# Allegro board hfplink.brd
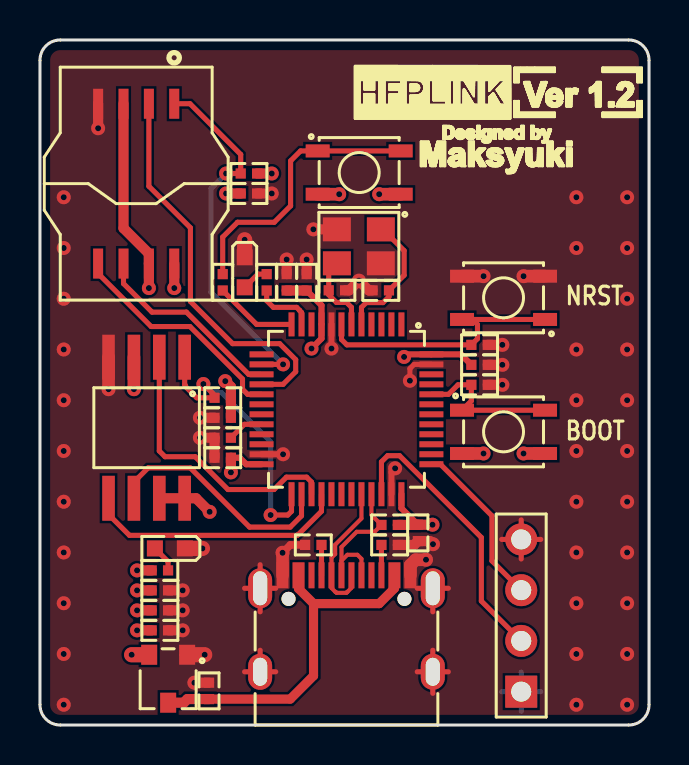
[diagram p0: board, top side]
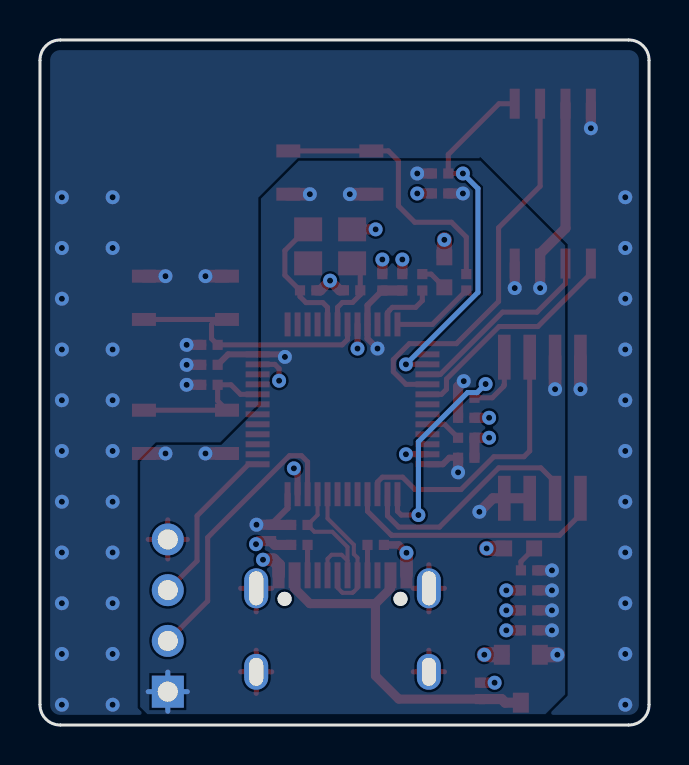
[diagram p1: board, bottom side, seen from below]

Outline 30.48 x 34.29 mm; copper layers: TOP, BOTTOM. Coordinates in mm from the lower left corner of the outline.
Outline path: 0,33.27 0,1.02 arc(0.3,0.3) 1.02,0 29.46,0 arc(30.18,0.3) 30.48,1.02 30.48,33.27 arc(30.18,33.99) 29.46,34.29 1.02,34.29 arc(0.3,33.99) 0,33.27

## Design rules (mm)
net group USB_DP: nets DN DP

## Placement (name value [footprint] x y rotation side)
C1  100nF  [C0402]  22 18.03 180 top
C2  10pF  [C0402]  17.06 21.76 180 top
C3  100nF  [C0402]  18.91 9.62 90 top
C4  10pF  [C0402]  14.86 21.76 0 top
C5  100nF  [C0402]  13.35 22.16 270 top
C6  10uF  [C0402]  8.46 1.71 90 top
C7  10uF  [C0402]  6 5.74 0 top
C8  10uF  [C0402]  6 4.74 0 top
C9  100nF  [C0402]  6 6.74 0 top
C10  100nF  [C0402]  12.35 22.16 90 top
C11  100nF  [C0402]  9.15 13.38 0 top
C12  100nF  [C0402]  22 19.03 0 top
C13  100nF  [C0402]  10.46 26.61 0 top
C14  100nF  [C0402]  9.15 15.38 180 top
J1  USB_TYPEC  [USB-TYPEC-12-SM]  15.34 5.08 0 top
J2  HEADER-4X1  [HDR4X1-2R54-TM-VM]  24.08 1.67 90 top
J3  ACA-SPI-004-K02  [ACA-SPI-004-K02-SM]  4.82 27.1 0 top
LED1  RED  [LED0603]  6.5 8.84 180 top
LED2  BLUE  [LED0603]  10.25 22.66 270 top
R1  5.1K  [R0402]  13.68 9.02 0 top
R2  5.1K  [R0402]  17.5 9.02 0 top
R3  1.5K  [R0402]  17.5 10.02 0 top
R4  2K  [R0402]  6 7.74 0 top
R5  2K  [R0402]  11.35 22.16 270 top
R6  10K  [R0402]  9.15 14.38 180 top
R7  10K  [R0402]  22 17.03 0 top
R8  330R  [R0402]  9.15 22.16 90 top
R9  10K  [R0402]  10.46 27.61 180 top
R10  10K  [R0402]  9.15 16.38 180 top
SW1  RESET  [SW-4-1R20X0R65-SM]  23.2 21.38 180 top
SW2  BOOT  [SW-4-1R20X0R65-SM]  23.2 14.68 0 top
SW3  USER  [SW-4-1R20X0R65-SM]  15.97 27.65 0 top
U1  STM/CH32V103C8T6  [LQFP-48-1R20X0R30]  15.34 15.8 180 top
U2  XC6206P332MR  [SOT-23-3-1R00X0R80]  6.42 2.32 270 top
U3  W25Q128JVSIQ  [SOIC-8-2R25X0R63]  5.34 14.88 180 top
X1  8MHz 10pF 10ppm  [XTAL-4-3R20X2R50-SM]  15.96 23.96 180 top

## Library data of the parts
C1-C14 = CAPACITOR-NON-POL
J1 = USB_TYPEC
J2 = HEADER-4X1
J3 = ACA-SPI-004-K02
LED1 LED2 = LED
R1-R10 = RESISTOR
SW1-SW3 = SW-KEY-4
U1 = STM/CH32F103C8T6
U2 = XC6206P332MR
U3 = W25Q128JVSIQ
X1 = XTAL-CRY-4

## Footprints (pads in the part's own frame, mm; a bottom-side part is the same pattern mirrored in y, then rotated)
ACA-SPI-004-K02-SM
  rect 0.5x1.5 smd: 1(1.905,4) 2(0.635,4) 3(-0.635,4) 4(-1.905,4) 5(-1.905,-4) 6(-0.635,-4) 7(0.635,-4) 8(1.905,-4)
C0402
  rect 0.51x0.51 smd: 1(-0.41,0) 2(0.41,0)
HDR4X1-2R54-TM-VM
  rect 1.6x1.6 hole 1: 1(0,0)
  round 1.6 hole 1: 2(2.54,0) 3(5.08,0) 4(7.62,0)
LED0603
  rect 0.8x0.8 smd: 1(0.75,0) 2(-0.75,0)
LQFP-48-1R20X0R30
  rect 0.3x1.2 smd: 1(-2.75,-4.25) 2(-2.25,-4.25) 3(-1.75,-4.25) 4(-1.25,-4.25) 5(-0.75,-4.25) 6(-0.25,-4.25) 7(0.25,-4.25) 8(0.75,-4.25) 9(1.25,-4.25) 10(1.75,-4.25) 11(2.25,-4.25) 12(2.75,-4.25) 25(2.75,4.25) 26(2.25,4.25) 27(1.75,4.25) 28(1.25,4.25) 29(0.75,4.25) 30(0.25,4.25) 31(-0.25,4.25) 32(-0.75,4.25) 33(-1.25,4.25) 34(-1.75,4.25) 35(-2.25,4.25) 36(-2.75,4.25)
  rect 1.2x0.3 smd: 13(4.25,-2.75) 14(4.25,-2.25) 15(4.25,-1.75) 16(4.25,-1.25) 17(4.25,-0.75) 18(4.25,-0.25) 19(4.25,0.25) 20(4.25,0.75) 21(4.25,1.25) 22(4.25,1.75) 23(4.25,2.25) 24(4.25,2.75) 37(-4.25,2.75) 38(-4.25,2.25) 39(-4.25,1.75) 40(-4.25,1.25) 41(-4.25,0.75) 42(-4.25,0.25) 43(-4.25,-0.25) 44(-4.25,-0.75) 45(-4.25,-1.25) 46(-4.25,-1.75) 47(-4.25,-2.25) 48(-4.25,-2.75)
R0402
  rect 0.51x0.51 smd: 1(-0.41,0) 2(0.41,0)
SOIC-8-2R25X0R63
  rect 0.63x2.25 smd: 1(-1.905,-3.53) 2(-0.635,-3.53) 3(0.635,-3.53) 4(1.905,-3.53) 5(1.905,3.53) 6(0.635,3.53) 7(-0.635,3.53) 8(-1.905,3.53)
SOT-23-3-1R00X0R80
  rect 1x0.8 smd: 1(-1.2,0.95) 2(-1.2,-0.95) 3(1.2,0)
SW-4-1R20X0R65-SM
  rect 1.2x0.65 smd: 1(-2.078,1.083) 2(2.077,1.083) 3(-2.078,-1.083) 4(2.077,-1.083)
USB-TYPEC-12-SM
  oval 1.2x2 hole 0.7x1.7: 1(-4.32,1.765) 2(4.32,1.765)
  oval 1.2x1.8 hole 0.7x1.4: 3(-4.32,-2.415) 4(4.32,-2.415)
  round 0.71 hole 0.7: 5(-2.9,1.235) 6(2.9,1.235)
  rect 0.6x1.3 smd: A1B12(-3.2,2.415) A4B9(-2.4,2.415) B1A12(3.2,2.415) B4A9(2.4,2.415)
  rect 0.3x1.3 smd: A5(-1.25,2.415) A6(-0.25,2.415) A7(0.25,2.415) A8(1.25,2.415) B5(1.75,2.415) B6(0.75,2.415) B7(-0.75,2.415) B8(-1.75,2.415)
XTAL-4-3R20X2R50-SM
  rect 1.4x1.2 smd: 1(-1.1,-0.85) 2(1.1,-0.85) 3(1.1,0.85) 4(-1.1,0.85)

## Nets
GND: C1.1 C2.2 C3.1 C4.2 C5.1 C6.2 C7.2 C8.2 C9.2 C10.2 C11.1 C12.2 C13.2 C14.2 J1.1(EP1) J1.2(EP2) J1.3(EP3) J1.4(EP4) J1.A1B12(GND#A1B12) J1.B1A12(GND#B1A12) J2.4 J3.4(GND) LED1.2 LED2.2 R1.1 R2.2 R6.2 R7.2 SW1.3 SW1.4 U1.8(VSSA) U1.23(VSS_1) U1.35(VSS_2) U1.47(VSS_3) U2.1(VSS) U3.4(GND) X1.2(GND#2) X1.4(GND#4)
VBUS: C6.1 J1.A4B9(VBUS#A4B9) J1.B4A9(VBUS#B4A9) U2.3(VIN)
VCC_3V3: C1.2 C3.2 C5.2 C7.1 C8.1 C9.1 C10.1 C11.2 C13.1 C14.1 J2.1 J3.3(WP#) J3.7(HOLD#) J3.8(VCC) R3.2 R4.1 R9.1 R10.1 SW2.3 SW2.4 SW3.3 SW3.4 U1.9(VDDA) U1.24(VDD_1) U1.36(VDD_2) U1.48(VDD_3) U2.2(VOUT) U3.3(W\P\) U3.7(H\O\L\D\) U3.8(VCC)
BOOT0: R7.1 SW2.1 SW2.2 U1.44(BOOT0)
DN: J1.A7(DN1) J1.B7(DN2) U1.32(PA11)
DP: J1.A6(DP1) J1.B6(DP2) R3.1 U1.33(PA12)
NRST: C12.1 SW1.1 SW1.2 U1.7(NRST)
PA2: R8.1 U1.12(PA2)
SPI1_CLK: J3.6(CLK) U1.15(PA5)
SPI1_CS: J3.1(CS#) R9.2 U1.14(PA4)
SPI1_MISO: J3.2(DO) U1.16(PA6)
SPI1_MOSI: J3.5(DIO) U1.17(PA7)
SPI2_CLK: U1.26(PB13) U3.6(CLK)
SPI2_CS: R10.2 U1.25(PB12) U3.1(C\S\)
SPI2_MISO: U1.27(PB14) U3.2(DO)
SPI2_MOSI: U1.28(PB15) U3.5(DI)
SWCLK: J2.3 U1.37(PA14)
SWDIO: J2.2 U1.34(PA13)
N04691: LED2.1 R5.1
N11046: R5.2 U1.11(PA1)
N0022019: R6.1 U1.20(PB2)
N23067: LED1.1 R4.2
N26605: C4.1 U1.6(PD1-OSC_OUT) X1.3(OUT2)
N26609: C2.1 U1.5(PD0-OSC_IN) X1.1(OUT1)
N34328: R8.2 SW3.1 SW3.2
N382768: J1.A5(CC1) R1.2
N382998: J1.B5(CC2) R2.1

Pads without a net: J1 5 6 A8 B8; U1 1 2 3 4 10 13 18 19 21 22 29 30 31 38 39 40 41 42 43 45 46

## Via types
v1: diameter 0.7, hole 0.305, TOP to BOTTOM, 84 vias

## Routing (per net, layer and track width the routed paths; a pad name or vN(x,y) marks a point on that pad's centre or on a via; arc(x,y) is an arc through that point)
GND: length 48.4
  TOP w0.254: v1(18.51,17.23) 18.51,17.84 18.73,18.05 U1.47 ; 18.88,2.66 J1.4 ; J1.4 20.44,2.66 ; J1.4 19.66,3.74 ; J1.4 19.66,1.59 ; J1.3 11.8,2.66 ; J1.3 10.24,2.66 ; J1.3 11.02,3.74 ; 18.88,6.85 J1.2 ; J1.2 20.44,6.85 ; J1.2 19.66,5.67 ; J2.4 25.06,9.29 ; J2.4 23.11,9.29 ; J2.4 24.08,10.27 ; J2.4 24.08,8.31 ; 10.24,6.85 J1.1 ; J1.1 11.8,6.85 ; J1.1 11.02,8.02 ; J1.1 11.02,5.67
  TOP w0.305: v1(17.77,12.85) 17.59,12.66 U1.35 ; U1.8 v1(14.59,18.84) ; U1.23 v1(12.17,13.55)
  TOP w0.381: R1.1 12.53,9.02 v1(12.14,8.62)
  TOP w0.508: R7.2 v1(23.14,17.03) ; C8.2 v1(7.14,4.74) ; C10.2 v1(12.35,23.3) ; v1(19.67,9.05) 19.51,9.21 C3.1 18.72,9.02 R2.2 ; C5.1 v1(13.35,23.3) ; C12.2 v1(23.14,19.03) ; C9.2 v1(7.14,6.74) ; C7.2 v1(7.14,5.74) ; J3.4 v1(2.91,29.87) ; C6.2 v1(7.73,2.12) ; C13.2 v1(11.6,26.61) ; v1(8,14.38) R6.2 C11.1 ; C4.2 15.48,21.76 v1(15.96,22.24) 16.45,21.76 C2.2 ; C14.2 v1(8,15.38) ; X1.2 v1(13.68,24.81) ; C1.1 v1(23.14,18.03)
  TOP w0.635: SW1.4 v1(22.2,22.47) ; J1.A1B12 v1(12.14,8.62) ; J1.B1A12 18.54,8.01 18.8,8.27 v1(19.32,8.27) ; U3.4 v1(3.43,16.81) ; SW1.3 v1(24.2,22.47)
  TOP w0.762: LED2.2 v1(10.25,24.29) ; LED1.2 v1(8.13,8.84) ; U2.1 v1(8.24,3.52)
  vias: v1(1.19,26.42) v1(1.19,23.88) v1(1.19,21.34) v1(1.19,18.8) v1(1.19,16.26) v1(1.19,13.72) v1(1.19,11.18) v1(1.19,8.64) v1(1.19,6.1) v1(1.19,3.56) v1(1.19,1.02) v1(26.84,26.42) v1(26.84,23.88) v1(26.84,18.8) v1(26.84,16.26) v1(26.84,13.72) v1(26.84,11.18) v1(26.84,8.64) v1(26.84,6.1) v1(26.84,3.56) v1(26.84,1.02) v1(29.38,26.42) v1(29.38,23.88) v1(29.38,21.34) v1(29.38,18.8) v1(29.38,16.26) v1(29.38,13.72) v1(29.38,11.18) v1(29.38,8.64) v1(29.38,6.1) v1(29.38,3.56) v1(29.38,1.02)
VBUS: length 18.2
  TOP w0.457: 13.69,6.08 16.98,6.08 17.74,6.84 J1.B4A9 ; 13.69,6.08 12.94,6.83 J1.A4B9 ; 13.69,6.08 13.69,2.46 12.53,1.3 C6.1
  TOP w0.508: C6.1 7.38,1.3 7.2,1.12 U2.3
VCC_3V3: length 44.9
  TOP w0.305: U1.36 18.09,10.85 C3.2 ; v1(13.59,18.84) 14.09,19.34 U1.9 14.09,21.01 C5.2 ; C11.2 10,13.38 10.32,13.05 U1.24 ; v1(18.22,18.43) 18.35,18.55 U1.48 21.07,18.55 C1.2
  TOP w0.508: C7.1 v1(4.86,5.74) ; v1(8.49,10.67) 7.81,11.35 U3.8 U3.7 ; v1(5.45,21.87) J3.7 5.45,23.6 4.18,24.87 J3.3 ; v1(9.27,17.21) 9.56,16.93 R10.1 C14.1 ; R3.2 18.9,10.02 C3.2 v1(19.64,10.03) ; C13.1 v1(9.31,26.61) ; R9.1 v1(11.6,27.61) ; C9.1 v1(4.86,6.74) ; C8.1 v1(4.86,4.74) ; C10.1 C5.2 ; J3.8 v1(6.72,21.87) ; R4.1 v1(4.86,7.74) ; C11.2 v1(9.56,12.65)
  TOP w0.635: SW2.3 v1(22.2,13.59) ; SW2.4 v1(24.2,13.59) ; SW3.3 v1(14.97,26.57) ; U3.3 v1(4.7,16.81) ; SW3.4 v1(16.97,26.57)
  TOP w0.762: U2.2 v1(4.59,3.52)
  BOTTOM w0.254: 24.08,0.69 J2.1 ; J2.1 23.11,1.67 ; J2.1 25.06,1.67 ; J2.1 24.08,2.65
BOOT0: length 7.8
  TOP w0.254: SW2.2 SW2.1 21.59,16.23 R7.1 20.92,17.03 20.44,16.55 U1.44
DN: length 7.1
  TOP w0.203: U1.32 16.09,10.34 14.77,9.02 14.77,8.56 14.59,8.37 J1.B7 14.59,6.86 14.78,6.67 14.79,6.67 14.84,6.62 15.33,6.62 15.38,6.67 15.39,6.67 15.59,6.87 J1.A7
DP: length 7.6
  TOP w0.203: 15.09,8.23 15.09,8.91 15.85,9.67 16.75,9.67 R3.1 16.59,10.52 U1.33 ; 15.09,8.23 15.38,8.52 15.89,8.52 16.09,8.32 J1.B6 ; 15.09,8.23 J1.A6
NRST: length 13
  TOP w0.254: SW1.1 21.64,20.3 ; 21.64,20.3 SW1.2 ; 21.64,20.3 21.89,20.05 21.89,19.34 C12.1 15.36,19.03 15.09,19.3 U1.7
PA2: length 4.1
  TOP w0.254: R8.1 10.84,20.05 U1.12
SPI1_CLK: length 9.8
  TOP w0.254: J3.6 4.18,22.09 5.61,20.67 7.33,20.67 10.44,17.55 U1.15
SPI1_CS: length 18.5
  TOP w0.254: J3.1 7.51,31.1 10.05,28.56 R9.2 v1(9.31,27.61) ; U1.14 v1(12.17,18.05)
  BOTTOM w0.254: v1(12.17,18.05) 8.56,21.66 8.56,26.85 v1(9.31,27.61)
SPI1_MISO: length 19.8
  TOP w0.254: U1.16 12.16,17.05 12.8,17.69 12.8,18.29 12,19.09 9.64,19.09 7.53,21.2 7.53,24.89 5.45,26.97 J3.2
SPI1_MOSI: length 11.5
  TOP w0.254: U1.17 10.39,16.55 10.14,16.81 10.14,17.32 7.51,19.95 5.56,19.95 2.91,22.6 J3.5
SPI2_CLK: length 12
  TOP w0.254: U3.6 4.7,12.16 5.41,12.87 7.52,12.87 10.49,9.91 12.52,9.91 13.09,10.47 U1.26
SPI2_CS: length 14.3
  TOP w0.254: U3.1 7.24,17.03 7.27,17.01 7.27,16.96 7.85,16.38 R10.2 8.74,16.51 v1(8.18,17.07) ; U1.25 12.59,10.7 12.4,10.51 v1(11.54,10.51)
  BOTTOM w0.254: v1(8.18,17.07) 8.61,16.64 9.08,16.64 11.54,14.18 v1(11.54,10.51)
SPI2_MISO: length 14.1
  TOP w0.254: U3.2 5.97,13.72 6.26,13.43 7.77,13.43 9.41,11.79 11.71,11.79 12.33,12.41 13.34,12.41 13.59,12.16 U1.27
SPI2_MOSI: length 13.3
  TOP w0.254: U1.28 14.09,10.7 12.91,9.53 12.91,9.53 12.88,9.49 4.48,9.49 3.43,10.54 U3.5
SWCLK: length 8.4
  TOP w0.254: J2.3 22.62,8.22 22.62,10.47 20.04,13.05 U1.37
SWDIO: length 14.4
  TOP w0.254: U1.34 17.09,13.17 17.4,13.48 18,13.48 22.09,9.39 22.09,6.21 J2.2
N04691: length 1.4
  TOP w0.254: LED2.1 10.9,22.57 R5.1
N11046: length 3.1
  TOP w0.254: R5.2 11.35,21.24 11.68,20.91 12.84,20.91 12.99,20.76 12.99,20.75 13.09,20.65 U1.11
N0022019: length 1.8
  TOP w0.254: R6.1 10.23,15.05 U1.20
N23067: length 1.4
  TOP w0.254: R4.2 6.41,8.18 LED1.1
N26605: length 4
  TOP w0.254: X1.3 14.45,22.7 C4.1 14.45,21.54 14.84,21.15 15.35,21.15 15.59,20.91 U1.6
N26609: length 6.7
  TOP w0.254: X1.1 17.16,24.81 18.22,23.75 18.22,22.51 C2.1 17.47,21.44 17.17,21.14 16.33,21.14 16.09,20.91 U1.5
N34328: length 13.9
  TOP w0.254: SW3.2 SW3.1 13.04,28.74 12.54,28.24 12.54,25.98 11.72,25.17 9.89,25.17 9.15,24.42 R8.2
N382768: length 1.5
  TOP w0.254: J1.A5 R1.2
N382998: length 1.5
  TOP w0.254: R2.1 J1.B5

## Copper pours and planes (outline as drawn; the poured copper is in the pictures)
GND on TOP: 1.02,0.51 0.66,0.66 0.51,1.02 0.51,33.27 0.66,33.63 1.02,33.78 29.46,33.78 29.82,33.63 29.97,33.27 29.97,1.02 29.82,0.66 29.46,0.51 ; 8 cut-outs
GND on BOTTOM: 1.02,0.51 0.66,0.66 0.51,1.02 0.51,33.27 0.66,33.63 1.02,33.78 29.46,33.78 29.82,33.63 29.97,33.27 29.97,1.02 29.82,0.66 29.46,0.51
VCC_3V3 on BOTTOM: 25.46,0.91 25.1,0.55 5.18,0.55 4.2,1.53 4.2,24.01 8.44,28.25 8.45,28.24 17.52,28.24 19.42,26.34 19.42,16 21.4,14.02 24.63,14.02 25.46,13.18

## Text on the board
Ref Des/Silkscreen Top: NRST | BOOT
NCLEGEND-1-2: FIGURE | SIZE | 12.0 | 27.56 | 39.37 | 55.12x27.56 | 66.93x27.56 | DRILL CHART: TOP to BOTTOM | ALL UNITS ARE IN MILS | PLATED | QTY | 84 | 2 | 4
